# Altium PCB PCB.PcbDoc
Units mm, origin at the board's own origin, x right, y up, seen from the top; angles counter-clockwise.
Board outline 78.49 x 53.21 mm, 2 copper layers (Top Layer, Bottom Layer); 23 components, 14 nets, 52 pads, 0 vias.
Unrouted connection lines stored in the file: 1.
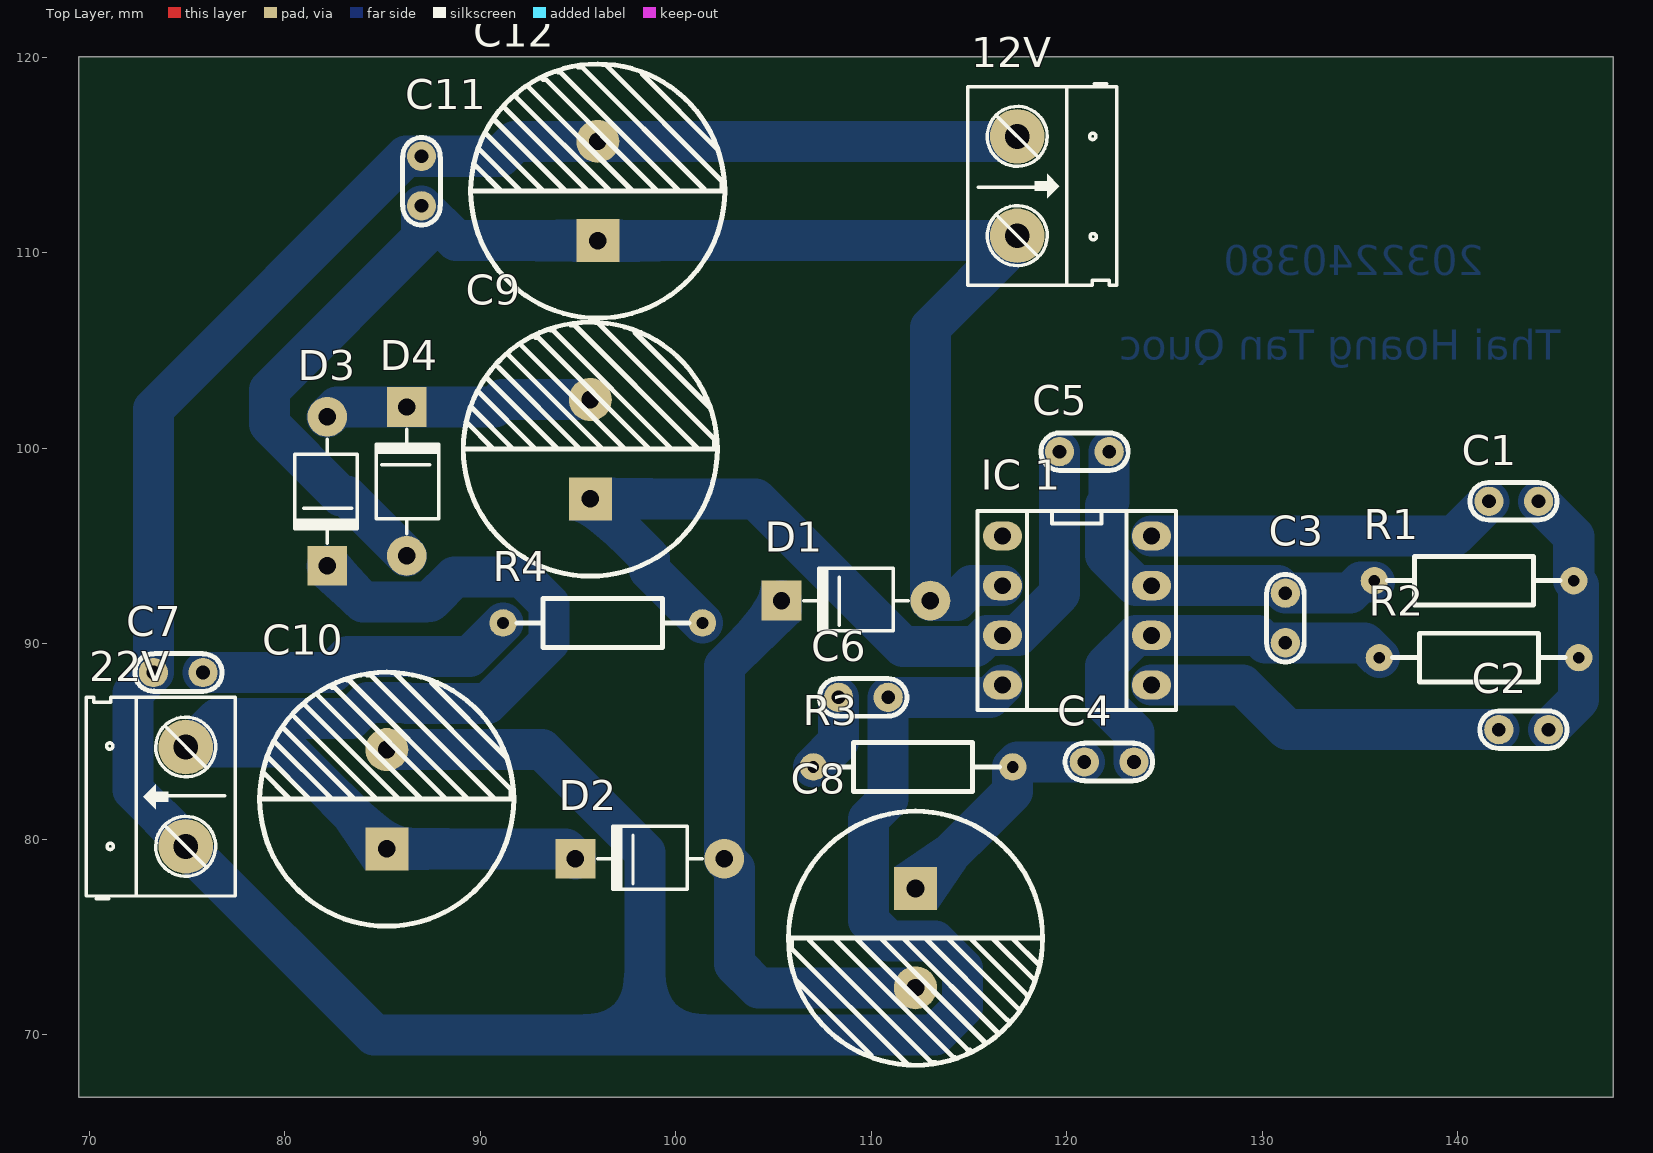
[diagram p0: Top Layer view]
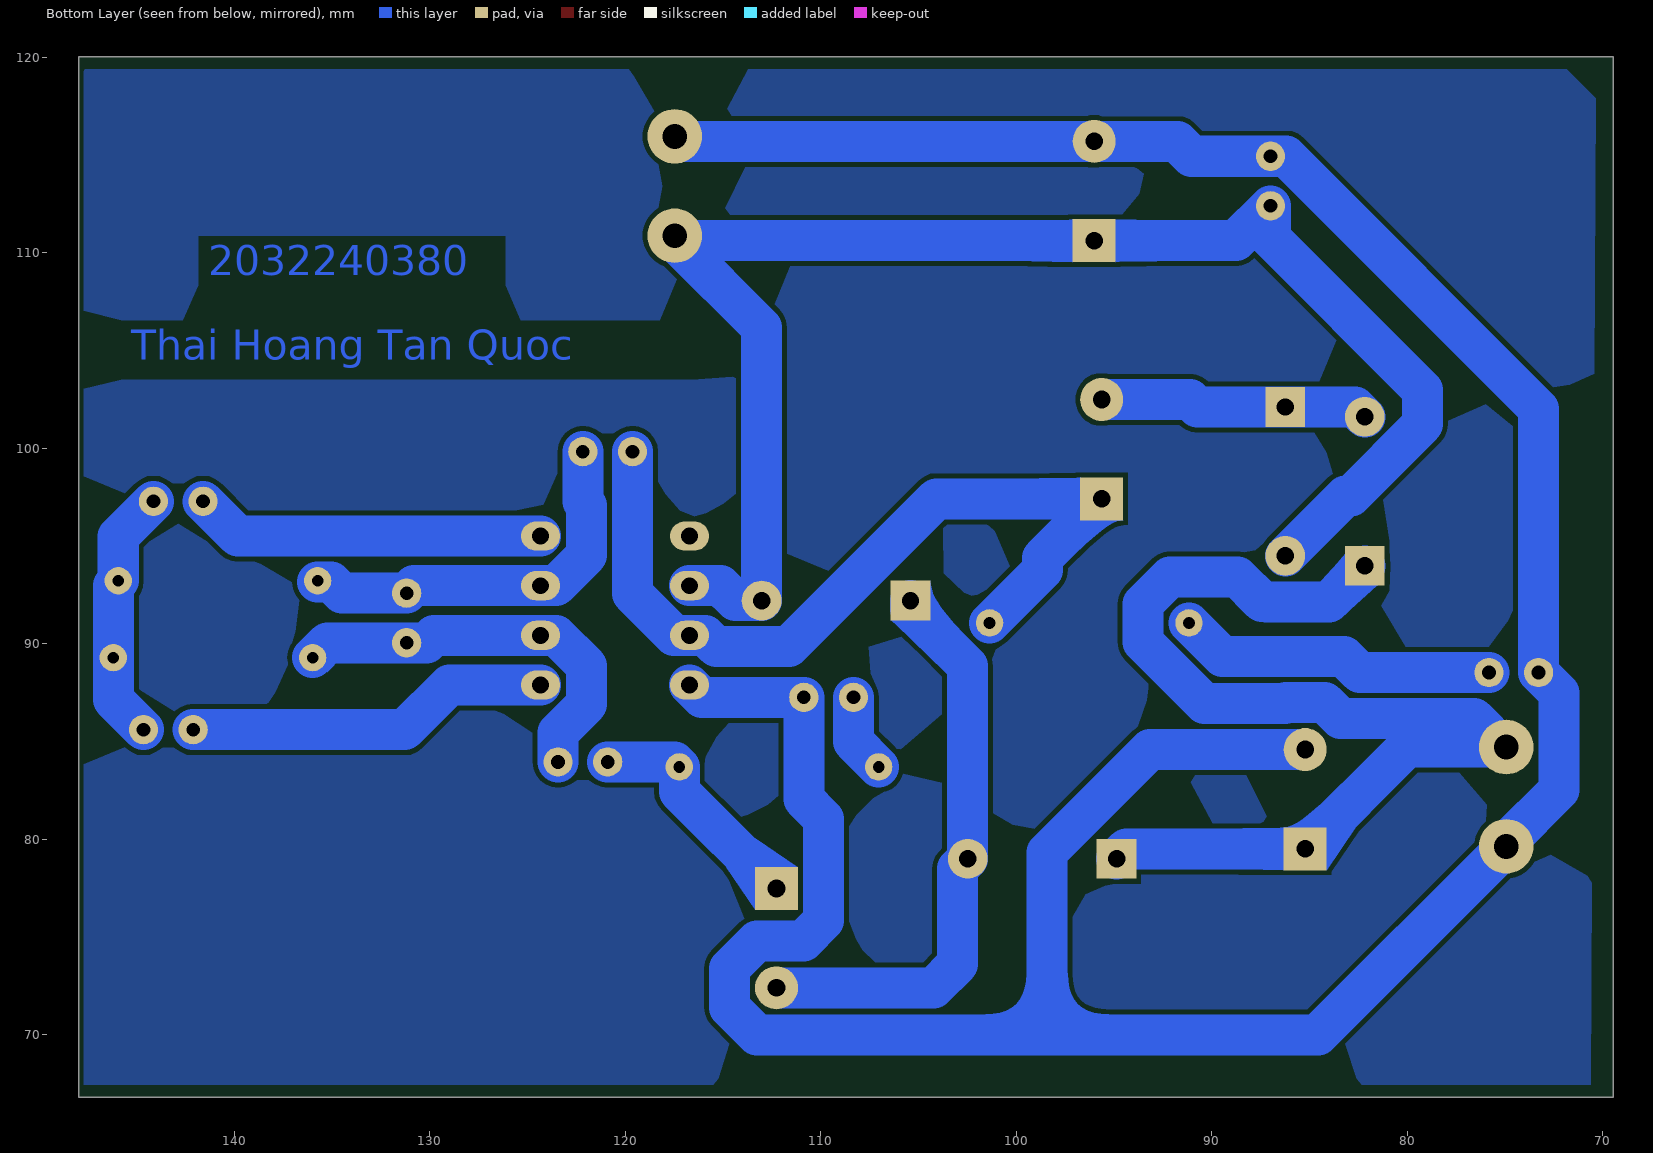
[diagram p1: Bottom Layer view, seen from below]
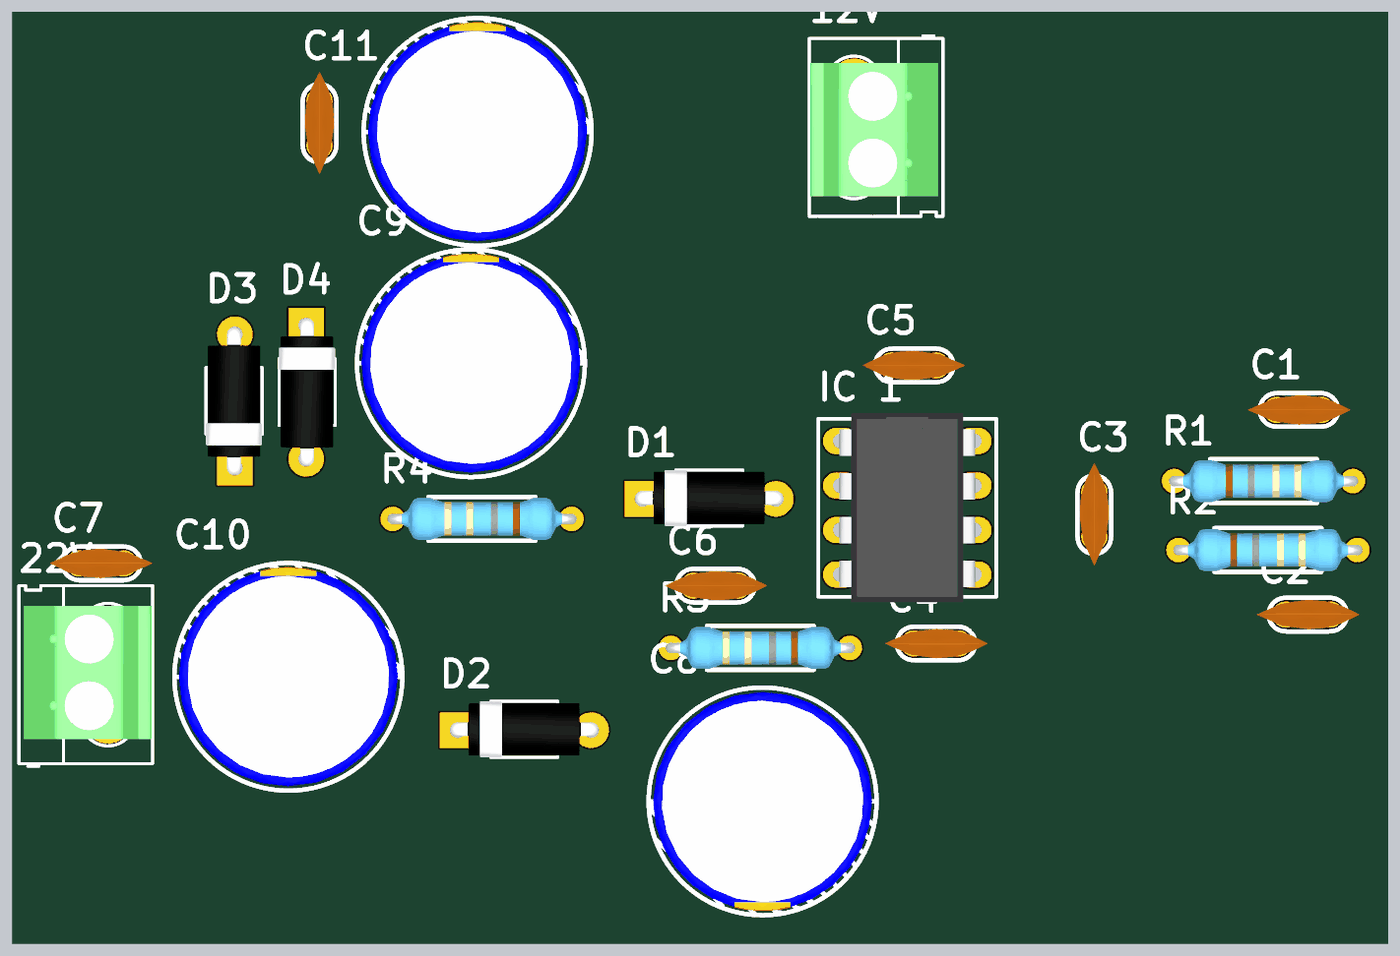
[diagram p2: 3D render of the assembled board from above, using the file's embedded part models]

## Layer stack, top to bottom
Top Solder: solder mask 0.0102, Solder Resist, Dk 3.5
Top Layer: signal copper 0.0356
Dielectric 1: dielectric 0.32, FR-4, Dk 4.8
Bottom Layer: signal copper 0.0356
Bottom Solder: solder mask 0.0102, Solder Resist, Dk 3.5

## Board outline
69.469,120.015 147.955,120.015 147.955,66.802 69.469,66.802

## Design rules (kind name [scope] priority, off if disabled: settings)
Clearance [All] p1: gap=0.254 ignorepadtopadclearanceinfootprint=FALSE
PolygonConnect [All] p1: connectstyle=Relief reliefconductorwidth=0.254 reliefentries=4 polygonreliefangle="90 Angle" airgapwidth=0.254
RoutingVias [All] p1: holewidth=0.711 width=1.27 viastyle="Through Hole" minholewidth=0.711 minwidth=1.27 maxholewidth=0.711 maxwidth=1.27
SolderMaskExpansion [All] p1: expansion=0.102 istentingtop=FALSE
SupplyNets "Schematic Supply Nets_1" [InNet('GND')] p1: voltage=0.000
SupplyNets "Schematic Supply Nets" [InNet('VCC')] p2: voltage=0.000
Width [All] p1: maxlimit=2.3 minlimit=0.254 preferedwidth=2.2 toplayer_maxwidth=0.254 toplayer_prefwidth=0.254 bottomlayer_minwidth=2.1 minimp=50.000000 maximp=50.000000 favimp=50.000000
30 further rules are at their usual default settings.

## Components (designator, comment, footprint, x,y, rotation, side; value= is the part's Value field where it differs from the comment)
12V "" "Con 2 KF301 5.08" 117.475,115.951 r270 top
22V "" "Con 2 KF301 5.08" 74.93,79.629 r90 top
C1 "0.022uF" "tu gom" 142.875,97.282 r0 top
C2 "0.022uF" "tu gom" 143.383,85.598 r0 top
C3 "0.047uF" "tu gom" 131.191,91.313 r90 top
C4 "0.022uF" "tu gom" 122.174,83.947 r0 top
C5 "0.022uF" "tu gom" 120.904,99.822 r180 top
C6 "0.1uF" "tu gom" 109.601,87.249 r0 top
C7 "0.1uF" "tu gom" 74.549,88.519 r180 top
C8 "470uF" "tu hoa 13mm" 112.268,74.93 r270 top
C9 "470uF" "tu hoa 13mm" 95.631,99.949 r90 top
C10 "1000uF" "tu hoa 13mm" 85.217,82.042 r90 top
C11 "0.1uF" "tu gom" 86.995,113.665 r90 top
C12 "1000uF" "tu hoa 13mm" 96.012,113.157 r90 top
D1 "100v" "DIODE 1A" 114.3,92.202 r0 top
D2 "100v" "DIODE 1A" 103.759,78.994 r0 top
D3 "100v" "DIODE 1A" 82.169,102.87 r90 top
D4 "100v" "DIODE 1A" 86.233,93.218 r270 top
"IC 1" "MH001571" DIP8 120.523,91.694 r270 top value="TDA2822 12V"
R1 "22k" "tro vach 1/4w" 140.843,93.218 r180 top
R2 "22k" "tro vach 1/4w" 141.097,89.281 r180 top
R3 "4.7K" "tro vach 1/4w" 112.141,83.693 r0 top
R4 "22k" "tro vach 1/4w" 96.266,91.059 r0 top

## Footprints (in the part's own frame and the unit in brackets; to place one, negate y for a bottom-side part, rotate by r counter-clockwise, add the part's x,y. Pads: shape width x height; smd on the part's side, far side on the other; paste and mask are expansions set on the pad)
"Con 2 KF301 5.08" [mil]
  round 110 hole 50: 1(0,0) 2(200,0)
  silkscreen extent -106,-100 300,200, body extent -45,-97 255,190, height 335
"DIODE 1A" [mil] "Diode 1A"
  round 80 hole 35: 1(-50,0)
  rect 80x80 hole 35: 2(-350,0)
  silkscreen extent -305,-61 -95,65, body extent -366,-61 -34,65, height 122
DIP8 [mm] "W.300/L.400"
  oval 1.5x2 hole 0.864: 1(-3.81,-3.81) 2(-1.27,-3.81) 3(1.27,-3.81) 4(3.81,-3.81) 5(3.81,3.81) 6(1.27,3.81) 7(-1.27,3.81) 8(-3.81,3.81)
  silkscreen extent -5.08,-5.08 5.08,5.08, body extent -5.4,-3.88 5.4,3.88, height 4.5
"tro vach 1/4w" [mm]
  round 1.4 hole 0.6: 1(-5.1,0) 2(5.1,0)
  silkscreen extent -4.39,-1.25 4.42,1.25, body extent -5.38,-1.2 5.38,1.2, height 2.41
"tu gom" [mm] "Tu gom mini"
  round 1.5 hole 0.7: 1(-1.27,0) 2(1.27,0)
  silkscreen extent -2.25,-0.97 2.22,0.97, body extent -2.92,-0.85 2.92,0.85, height 6.12
"tu hoa 13mm" [mm]
  rect 2.2x2.2 hole 0.9: 1(-2.54,0)
  round 2.2 hole 0.9: 2(2.54,0)
  silkscreen extent -6.5,-6.5 6.5,6.5, body extent -6.25,-6.25 6.26,6.25, height 23.02

## Part data
12V 22V: library part "CON 2 KF301", "Cắm", Chung_Loai=Cắm, Don_Vi=Con, Ma_Hang=MH000987, Ten_Linh_Kien="CON 2 KF301-2P 5.08MM Xanh Dương"
C1 C2 C3 C4 C5 C6 C7 C11: library part "Tu gom 104 50V", "Cắm", Chung_Loai=Cắm, Don_Vi=Con, Ma_Hang=MH004761, So_Chan=2, Ten_Linh_Kien="Tụ gốm 104 100nF 50V"
C8 C9 C10 C12: library part "Tu Hoa 1000uF 50V 13x26", "Cắm", Chung_Loai=Cắm, Don_Vi=Con, Ma_Hang=MH006619, So_Chan=2, Ten_Linh_Kien="Tụ Hóa 1000uF 50V"
D1 D2 D3 D4: library part "Diode 1N4007", "Cắm", Chung_Loai=Cắm, Don_Vi=Con, Ma_Hang=MH001063, Ten_Linh_Kien="Diode 1N4007 1A (DIP)"
"IC 1": library part "TDA2822 DIP", "Cắm"
R1 R2 R3 R4: library part "Tro Vach 1/4W 5% 22k", "Cắm", Chung_Loai=Cắm, Don_Vi=Con, Ma_Hang=MH007301, So_Chan=2, Ten_Linh_Kien="Trở Vạch 1/4w 5% 22k"

## Nets (pads, with @x,y where several pads share a name; then routed paths per layer and width w, separated by ;. In a path a pad name is that pad's centre, name@x,y a point inside that pad or via, vN(x,y) a via of type N, cw(c..) or ccw(c..) an arc to the next point about the centre after c; other vN are vias at no path point)
GND: 12V.1 22V.1 "IC 1.4" C6.2 C7.2 C10.2 C11.2 C12.2 | length 168.7
  Bottom Layer w2.1: C10.2 93.157,84.582 98.425,79.314 98.425,69.986 ; 116.713,87.884 116.078,87.249 C6.2 110.871,82.043 109.864,81.036 109.864,75.83 110.9,74.794 113.264,74.794 114.672,73.386 114.672,71.394 113.264,69.986 98.425,69.986 ; 12V.1 117.287,115.951 117.033,115.697 C12.2 95.993,115.678 91.766,115.678 91.023,114.935 C11.2 86.206,114.935 73.279,102.008 C7.2 72.229,87.469 72.229,82.518 74.93,79.817 22V.1 84.573,69.986 98.425,69.986
Net22V_2: 22V.2 C10.1 D2.2 D3.2 | length 58.1
  Bottom Layer w2.1: 22V.2 22V.2@75.118,84.709 ; D3.2 84.015,92.134 87.208,92.134 87.242,92.168 87.439,92.168 88.684,93.413 92.141,93.413 93.52,92.034 93.52,90.084 90.372,86.936 86.263,86.936 86.213,86.986 84.221,86.986 83.4,86.165 76.574,86.165 22V.2@75.118,84.709 ; D2.2 94.361,79.502 C10.1 80.01,84.709 22V.2@75.118,84.709
NetC1_1: "IC 1.8" C1.1 | length 18
  Bottom Layer w2.1: 124.333,95.504 139.827,95.504 C1.1
NetC1_2: C1.2 C2.2 R1.1 R2.1 | length 13.2
  Bottom Layer w2.1: C1.2 145.943,95.484 R1.1 146.197,92.964 R2.1 146.197,87.142 C2.2
NetC2_1: "IC 1.5" C2.1 | length 18.7
  Bottom Layer w2.1: 124.333,87.884 129.005,87.884 131.291,85.598 C2.1
NetC3_1: "IC 1.6" C3.1 C4.2 R2.2 | length 20.7
  Bottom Layer w2.1: C4.2 123.444,85.444 121.979,86.909 121.979,88.859 123.544,90.424 124.333,90.424 129.794,90.424 130.175,90.043 C3.1 135.235,90.043 R2.2
NetC3_2: "IC 1.7" C3.2 C5.1 R1.2 | length 20.2
  Bottom Layer w2.1: C5.1 122.174,97.273 121.979,97.078 121.979,94.529 123.544,92.964 130.81,92.964 C3.2 ; C3.2@131.218,92.583 134.493,92.583 135.06,93.15 R1.2@135.743,93.15
NetC4_1: "IC 1.1" C4.1 C8.1 R3.2 | length 12.1
  Bottom Layer w2.1: C8.1 117.241,82.443 R3.2 117.495,83.947 C4.1
NetC5_2: "IC 1.3" C5.2 C9.1 R4.2 | length 44.3
  Bottom Layer w2.1: R4.2 98.651,93.774 98.651,94.389 C9.1 104.079,97.409 111.64,89.848 115.348,89.848 115.924,90.424 116.713,90.424 117.502,90.424 119.634,92.556 119.634,93.545 119.625,93.554 119.625,99.813 C5.2
NetC6_1: C6.1 R3.1 | length 4.1
  Bottom Layer w2.1: R3.1 108.331,84.983 C6.1
NetC7_1: C7.1 R4.1 | length 16.4
  Bottom Layer w2.1: C7.1 82.425,88.519 83.246,89.34 89.447,89.34 R4.1
NetC8_2: C8.2 D1.2 D2.1 | length 29.8
  Bottom Layer w2.1: D1.2 105.41,91.774 102.489,88.853 D2.1 102.997,78.486 102.997,73.62 104.227,72.39 C8.2
NetC9_2: C9.2 D3.1 D4.2 | length 13.8
  Bottom Layer w2.1: D3.1 82.677,102.108 D4.2 90.728,102.108 91.109,102.489 C9.2
VCC: 12V.2 "IC 1.2" C11.1 C12.1 D1.1 D4.1 | length 80.2
  Bottom Layer w2.1: D4.1 83.165,97.556 82.883,97.556 79.215,101.225 79.215,102.964 86.995,110.744 C11.1 88.773,110.617 C12.1 117.033,110.617 117.287,110.871 12V.2 117.602,110.744 117.536,110.744 117.342,110.55 117.342,110.484 113.03,106.172 D1.1 114.373,92.202 115.135,92.964 116.713,92.964

## Polygon pours and split planes (outlines as drawn)
no net on Bottom Layer "NONET_L02_P000" (solid, pour order 0): 70.358,119.38 147.828,119.38 147.701,119.253 147.701,67.437 70.612,67.437

## Other copper
Bottom Layer:
  text "2032240380" at 141.351,108.839 h1.52
  text "Thai Hoang Tan Quoc" at 145.288,104.521 h1.52